# EAGLE board injector-driver-01 (EAGLE 4.16)
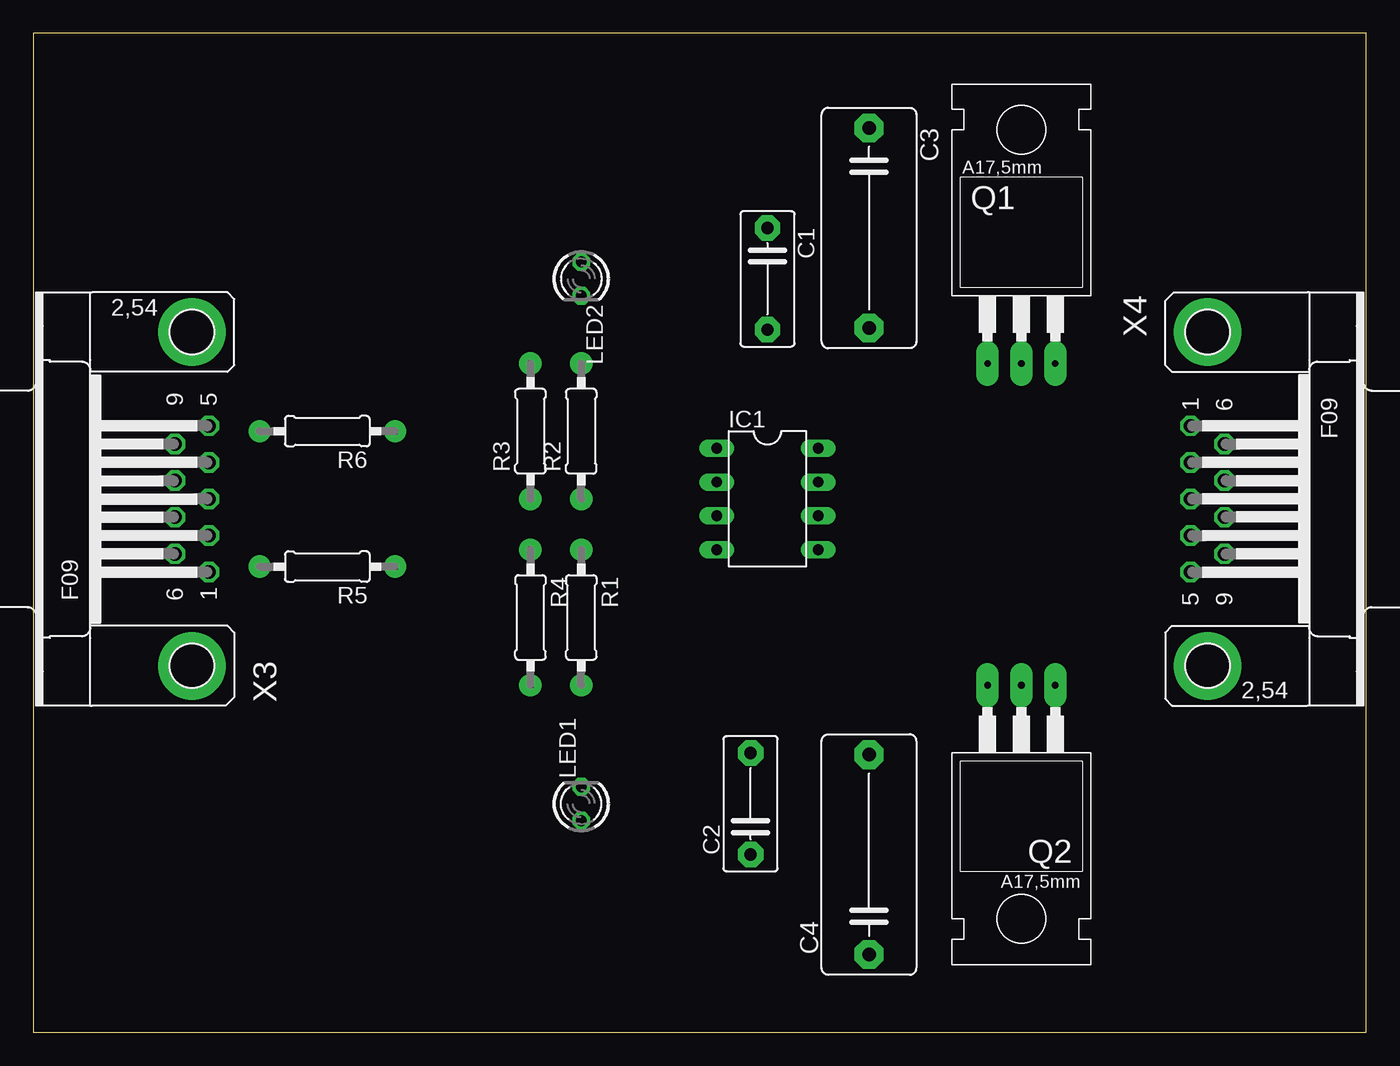
[diagram p0: board, top side]
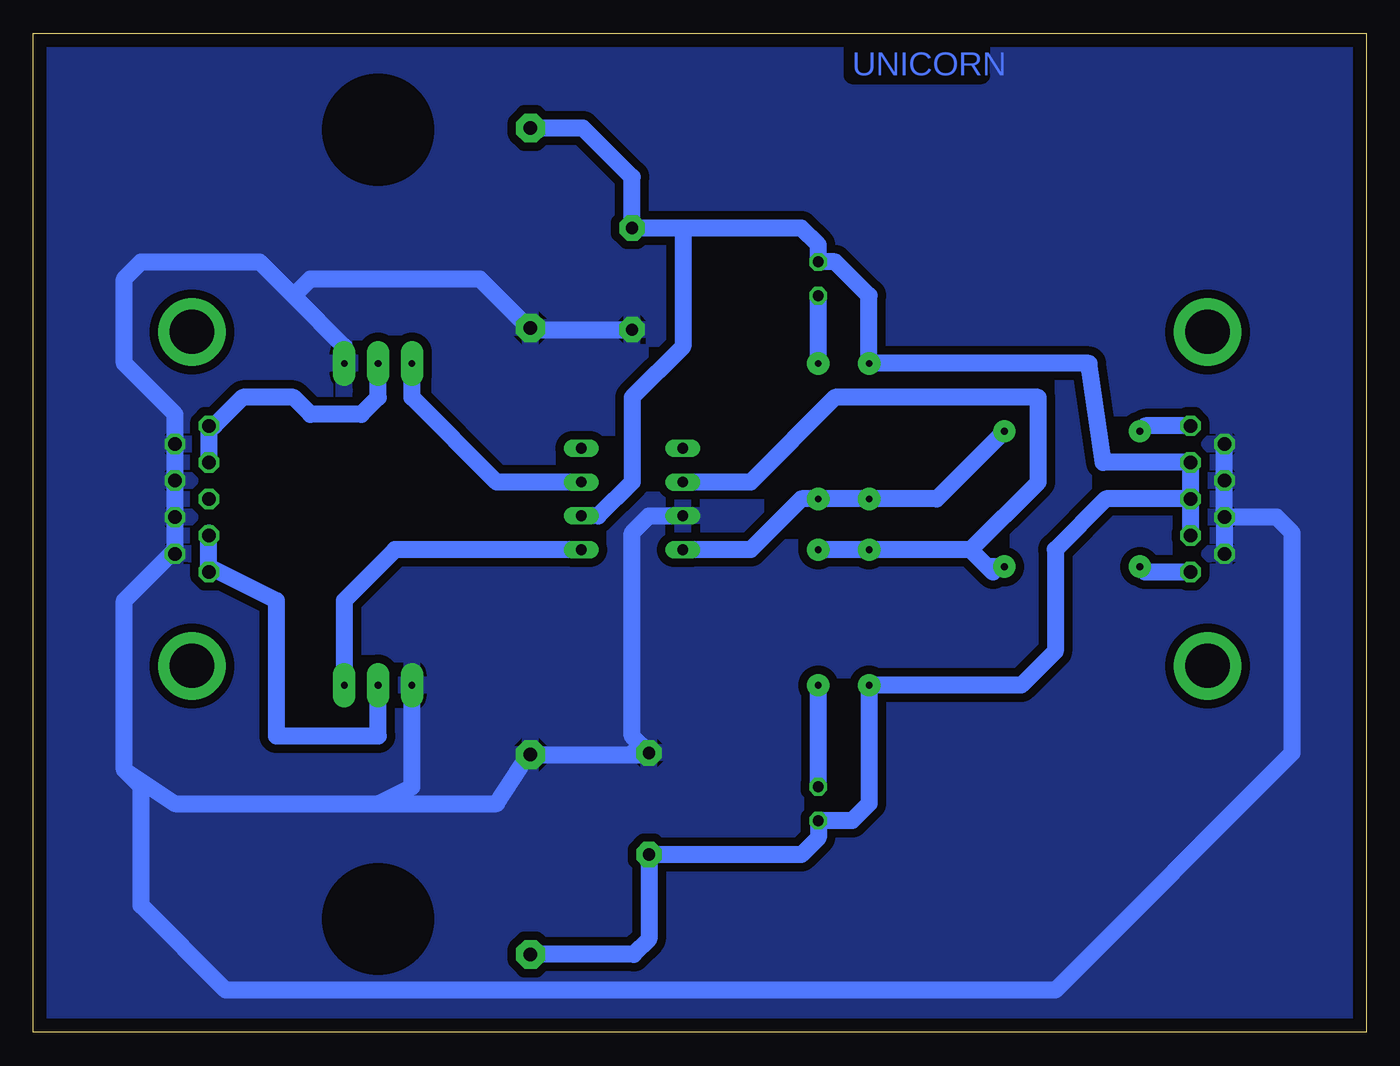
[diagram p1: board, bottom side, seen from below]

Size 100 x 74.92 mm. Coordinates in mm from the lower left corner, seen from the top.
Outline: 0,0 100,0 100,74.92 0,74.92 0,0
Copper layers (1*16): Top 0.035mm / dielectric 1.5mm / Bottom 0.035mm
Design rules "default": minimum track width 10mil, minimum drill 24mil, track to track 25mil, track to pad 25mil, pad to pad 25mil, via to via 25mil, smd to smd 8mil, copper to edge 40mil, drill to drill 8mil, minimum pad ring 10mil, minimum via ring 8mil, stop-mask expansion 4mil, vias tented up to drill 0mil, thermal gap 10mil

## Footprints (pad centres in the part's own frame; a part is rotated, then mirrored left to right if it is on the bottom)
C7.5B4 = drill 0.914 pad 1.905 octagon: 1 -3.81,0; 2 3.81,0
C15B7 = drill 1.016 pad 2.159 octagon: 1 -7.493,0; 2 7.493,0
DIL08 = drill 0.813 long: 1 -3.81,-3.81; 2 -1.27,-3.81; 3 1.27,-3.81; 4 3.81,-3.81; 5 3.81,3.81; 6 1.27,3.81; 7 -1.27,3.81; 8 -3.81,3.81
LED3MM = drill 0.813 octagon: A -1.27,0; K 1.27,0
TO220 = drill 0.5 pad 1.676 long: 1 -2.54,-6.35; 2 0,-6.35; 3 2.54,-6.35
0207/10 = drill 0.5 pad 1.676 round: 1 -5.08,0; 2 5.08,0
F09HP = drill 1.016 octagon: 1 -5.486,-1.27; 2 -2.743,-1.27; 3 0,-1.27; 4 2.743,-1.27; 5 5.486,-1.27; 6 -4.115,1.27; 7 -1.372,1.27; 8 1.372,1.27; 9 4.115,1.27 | drill 3.302 pad 5.08 round: G1 -12.522,0; G2 12.522,0

## Placement (x,y rotation side)
C1  [C7.5B4]  55.08,56.51 270 top
C2  [C7.5B4]  53.81,17.14 90 top
C3  [C15B7]  62.7,60.32 270 top
C4  [C15B7]  62.7,13.33 90 top
IC1  ICL7665CPA  [DIL08]  55.08,40 270 top
LED1  [LED3MM]  41.11,17.14 90 top
LED2  [LED3MM]  41.11,56.51 270 top
Q1  IRF510  [TO220]  74.13,56.51 0 top
Q2  IRF510  [TO220]  74.13,19.68 180 top
R1  [0207/10]  41.11,31.11 270 top
R2  [0207/10]  41.11,45.08 90 top
R3  [0207/10]  37.3,45.08 90 top
R4  [0207/10]  37.3,31.11 270 top
R5  [0207/10]  22.06,34.92 180 top
R6  [0207/10]  22.06,45.08 180 top
X3  [F09HP]  11.9,40 90 top
X4  [F09HP]  88.1,40 270 top

## Library data of the parts
C1-C4 = capacitor-wima
IC1 = maxim
LED1 LED2 = led
Q1 Q2 = transistor-fet
R1-R6 = rcl
X3 X4 = con-subd

## Nets
+12V: C1.1 C2.1 C3.1 C4.1 IC1.6 LED1.A LED2.A R3.2 R4.2 X3.2 X3.3 X3.4
GND: C1.2 C2.2 C3.2 C4.2 IC1.3 Q1.3 Q2.3 X3.6 X3.7 X3.8 X3.9 X4.6 X4.7 X4.8 X4.9
N$1: R6.2 X3.5
N$3: IC1.5 Q2.1
N$4: IC1.2 R1.1 R4.1 R5.1
N$5: IC1.7 Q1.1
N$6: IC1.4 R2.1 R3.1 R6.1
N$7: Q2.2 X4.4 X4.5
N$8: Q1.2 X4.1 X4.2
N$13: LED1.K R1.2
N$14: LED2.K R2.2
N$22: R5.2 X3.1
V+: IC1.8

## Tracks (layer width: path | path; a pad name or v marks a point on that pad's centre or on a via)
+12V
  Bottom 1.27: C4.1 54.95,5.84 53.81,6.98 C2.1 42.38,13.33 41.11,14.6 LED1.A 38.57,15.87 37.3,17.14 R4.2 25.87,26.03 23.33,28.57 23.33,36.19 19.52,40 X3.3 | C3.1 58.76,67.81 55.08,64.13 C1.1 51.27,60.32 | 51.27,60.32 42.38,60.32 41.11,59.05 LED2.A 39.84,57.78 37.3,55.24 R3.2 20.79,50.16 19.72,42.74 X3.4 X3.3 | IC1.6 57.62,38.73 55.08,41.27 55.08,47.62 51.27,51.43 51.27,60.32 | X3.2 X3.3
GND
  Bottom 1.27: X4.7 89.37,41.27 | X4.7 X4.6 89.37,46.35 93.18,50.16 93.18,56.51 91.91,57.78 83.02,57.78 80.48,55.24 | X4.7 X4.8 X4.9 89.67,35.89 93.18,32.38 93.18,19.68 | 93.18,19.68 89.37,17.14 74.13,17.14 | 74.13,17.14 71.59,18.41 Q2.3 | 80.48,55.24 76.67,51.43 Q1.3 | 74.13,17.14 65.24,17.14 62.83,20.82 C4.2 53.94,20.82 C2.2 | 80.48,55.24 79.21,56.51 66.51,56.51 62.83,52.83 C3.2 62.7,52.7 C1.2 | C2.2 55.08,20.95 | IC1.3 53.81,38.73 55.08,37.46 55.08,22.22 C2.2 | X3.7 10.63,38.73 | X3.7 X3.6 | X3.7 X3.8 X3.9 | X3.7 6.72,38.63 5.55,37.46 5.55,20.95 23.33,3.17 85.56,3.17 91.91,9.52 91.91,18.41 93.18,19.68
  pour Bottom: 0.47,75.56 0.47,0.63 99.53,0.63 99.53,75.56
N$1
  Bottom 1.27: X3.5 16.57,45.49 R6.2
N$3
  Bottom 1.27: Q2.1 76.67,32.38 72.86,36.19 IC1.5
N$4
  Bottom 1.27: 28.41,34.92 28,34.51 | 28.41,34.92 29.68,36.19 | 29.68,36.19 R4.1 R1.1 29.68,36.19 | R5.1 28.41,34.92 | 29.68,36.19 24.6,41.27 24.6,47.62 39.84,47.62 46.19,41.27 IC1.2
N$5
  Bottom 1.27: IC1.7 65.24,41.27 71.59,47.62 Q1.1
N$6
  Bottom 1.27: R6.1 32.22,40 R3.1 R2.1 42.38,40 46.19,36.19 IC1.4
N$7
  Bottom 1.27: Q2.2 74.13,22.22 81.75,22.22 81.75,32.38 86.83,34.92 | 86.83,34.92 X4.5 | 86.83,37.46 X4.4 86.83,34.92
N$8
  Bottom 1.27: X4.2 X4.1 86.42,45.49 84.29,47.62 80.48,47.62 79.21,46.35 75.4,46.35 74.13,47.62 Q1.2
N$13
  Bottom 1.27: LED1.K R1.2
N$14
  Bottom 1.27: R2.2 LED2.K
N$22
  Bottom 1.27: X3.1 16.57,34.51 R5.2

## Text on the board
Bottom: UNICORN